# EAGLE board attiny85-mini-mk-1.0 (EAGLE 6.5.0)
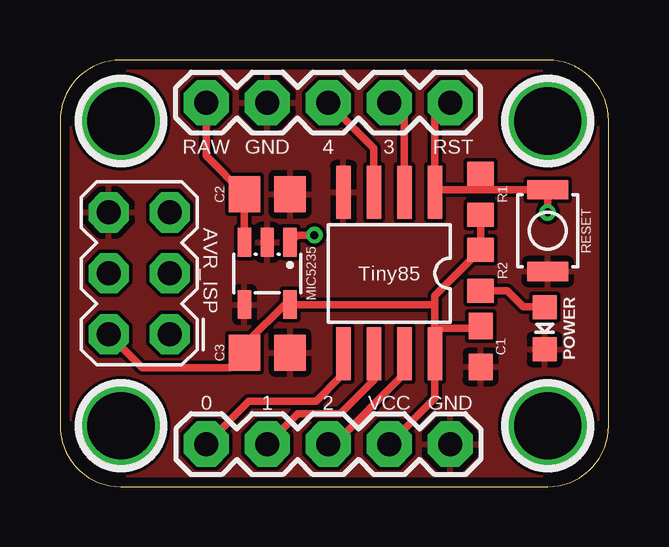
[diagram p0: board, top side]
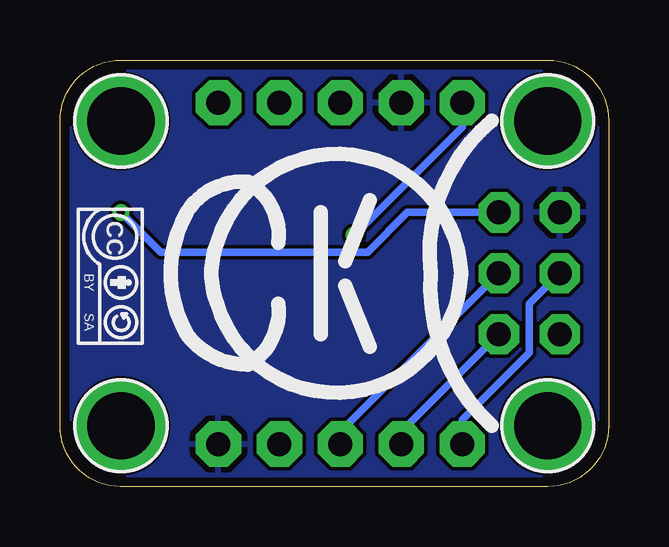
[diagram p1: board, bottom side, seen from below]

Size 22.86 x 17.78 mm. Coordinates in mm from the lower left corner, seen from the top.
Outline: 0,15.24 0,2.54 arc90 2.54,0 20.32,0 arc90 22.86,2.54 22.86,15.24 arc90 20.32,17.78 2.54,17.78 arc90 0,15.24
Copper layers (1*16): Top 0.0356mm / dielectric 1.5011mm / Bottom 0.0356mm
Design rules "LaenPCBOrder2": minimum track width 6mil, minimum drill 13mil, track to track 6mil, track to pad 6mil, pad to pad 6mil, via to via 6mil, smd to smd 6mil, copper to edge 15mil, drill to drill 6mil, minimum pad ring 7mil, minimum via ring 7mil, stop-mask expansion 3mil, vias tented up to drill 20mil, thermal gap 10mil

## Footprints (pad centres in the part's own frame; a part is rotated, then mirrored left to right if it is on the bottom)
2X3 = drill 1 pad 1.676 octagon: 1 -2.54,-1.27; 2 -2.54,1.27; 3 0,-1.27; 4 0,1.27; 5 2.54,-1.27; 6 2.54,1.27
C0603 = smd 1.1 x 1: 1 -0.85,0; 2 0.85,0
C0805 = smd 1.3 x 1.5: 1 -0.95,0; 2 0.95,0
HOLE-#2 = drill 2.8 pad 3.81: P$1 0,0
SO08-EIAJ = smd 0.61 x 2.21: 1 -1.905,-3.378; 2 -0.635,-3.378; 3 0.635,-3.378; 4 1.905,-3.378; 5 1.905,3.353; 6 0.635,3.353; 7 -0.635,3.353; 8 -1.905,3.353
1X05 = drill 1 pad 1.88 octagon: 1 0,0; 2 2.54,0; 3 5.08,0; 4 7.62,0; 5 10.16,0
SOT23-5 = smd 0.55 x 1.2: 1 -0.95,-1.3; 2 0,-1.3; 3 0.95,-1.3; 4 0.95,1.3; 5 -0.95,1.3
LED-0603 = smd 1 x 1: A 0,-0.877; C 0,0.877
R0603 = smd 1 x 1.1: 1 -0.85,0; 2 0.85,0
B3U-1000P = smd 0.8 x 1.7: 0 1.7,0; 1 -1.7,0

## Placement (x,y rotation side)
AVR_ISP  AVR_SPI_PRG_6PTH  [2X3]  3.3,8.89 90 top
C1  1uF  [C0603]  17.53,5.84 270 top
C2  1uF  [C0805]  8.64,12.19 0 top
C3  10uF  [C0805]  8.64,5.59 0 top
H1  HOLE#2  [HOLE-#2]  2.54,15.24 270 top
H2  HOLE#2  [HOLE-#2]  20.32,15.24 270 top
H3  HOLE#2  [HOLE-#2]  2.54,2.54 270 top
H4  HOLE#2  [HOLE-#2]  20.32,2.54 270 top
IC1  Tiny85  [SO08-EIAJ]  13.72,8.89 180 top
JP1  [1X05]  16.26,16 180 top
JP2  [1X05]  6.1,1.78 0 top
MIC5235  V_REG_MIC5235  [SOT23-5]  8.64,8.89 180 top
POWER  LED0603  [LED-0603]  20.19,6.6 180 top
R1  10k  [R0603]  17.53,12.19 90 top
R2  330R  [R0603]  17.53,9.02 270 top
RESET  SPST-NO-TACTB3U-1000P  [B3U-1000P]  20.32,10.67 90 top
U$1  CC-BY-SA-4.0NO-URL  [CC-BY-SA-4.0-NO-URL]  20.57,10.41 270 bottom
U$2  [COW]  12.5,8.89 270 bottom

## Library data of the parts
AVR_ISP C1-C3 H1-H4 JP1 JP2 MIC5235 POWER R1 R2 RESET U$1 U$2 = A_butts
IC1 = A_butts; PROD_ID: IC-09092

## Nets
D0: AVR_ISP.4 IC1.5 JP2.1
D1: AVR_ISP.1 IC1.6 JP2.2
D2: AVR_ISP.3 IC1.7 JP2.3
D3: IC1.2 JP1.2
D4: IC1.3 JP1.3
GND: AVR_ISP.6 C1.2 C2.2 C3.2 IC1.4 JP1.4 JP2.5 MIC5235.2 MIC5235.4 POWER.C RESET.1
N$7: POWER.A R2.2
RAW: C2.1 JP1.5 MIC5235.1 MIC5235.3
RST: AVR_ISP.5 IC1.1 JP1.1 R1.2 RESET.0
VCC: AVR_ISP.2 C1.1 C3.1 IC1.8 JP2.4 MIC5235.5 R1.1 R2.1

## Tracks (layer width: path | path; a pad name or v marks a point on that pad's centre or on a via)
D0
  Top 0.305: JP2.1 7.87,3.56 10.67,3.56 11.68,4.57 11.68,5.41 IC1.5
  Bottom 0.305: AVR_ISP.4 3.3,7.62 3.3,5.59 6.1,2.79 JP2.1
D1
  Top 0.305: JP2.2 9.91,3.05 11.68,3.05 13.08,4.45 IC1.6
  Bottom 0.305: JP2.2 8.64,2.29 AVR_ISP.1
D2
  Top 0.305: JP2.3 11.43,1.78 14.35,4.7 IC1.7
  Bottom 0.305: JP2.3 11.18,2.29 AVR_ISP.3
D3
  Top 0.305: IC1.2 14.35,15.37 JP1.2
D4
  Top 0.305: IC1.3 13.08,14.1 JP1.3
GND
  pour Top: 20.32,0 2.54,0 arc-90 0,2.54 0,15.24 arc-90 2.54,17.78 20.32,17.78 arc-90 22.86,15.24 22.86,2.54 arc-90
  pour Bottom: 20.32,0 2.54,0 arc-90 0,2.54 0,15.24 arc-90 2.54,17.78 20.32,17.78 arc-90 22.86,15.24 22.86,2.54 arc-90
N$7
  Top 0.305: POWER.A 20.18,7.49 19.3,7.49 18.63,8.17 R2.2
RAW  (via drill 0.33)
  Top 0.305: JP1.5 6.1,13.78 C2.1 MIC5235.3 | v10.6,10.48 9.88,10.48 MIC5235.1
  Bottom 0.305: JP1.5 6.1,14.99 v10.6,10.48
RST  (via drill 0.33)
  Top 0.305: JP1.1 15.62,15.37 IC1.1 15.72,12.37 17.53,12.37 | v20.32,11.43 RESET.0 17.53,12.37 | R1.2 17.53,12.37
  Bottom 0.305: AVR_ISP.5 8.38,11.43 10.03,9.78 18.67,9.78 v20.32,11.43
VCC
  Top 0.305: IC1.8 15.62,3.68 JP2.4 | 15.75,5.66 IC1.8 | R1.1 R2.1 15.62,7.96 15.62,7.59 | 15.62,7.59 MIC5235.5 9.37,7.59 7.87,6.1 7.87,5.78 C3.1 7.05,4.95 3.43,4.95 AVR_ISP.2 | 15.62,7.59 15.62,6.6 | 15.62,6.6 IC1.8 | C1.1 17.44,6.6 15.62,6.6

## Text on the board
tPlace: RAW | GND | 4 | 3 | RST | 0 | 1 | 2 | VCC | GND